# Altium PCB HMC5883_module.PcbDoc
Units mm, origin at the board's own origin, x right, y up, seen from the top; angles counter-clockwise.
Board outline 61.47 x 21.97 mm, 2 copper layers (Top Layer, Bottom Layer), stack 1.569 mm thick; 54 components, 38 nets, 185 pads, 112 vias.
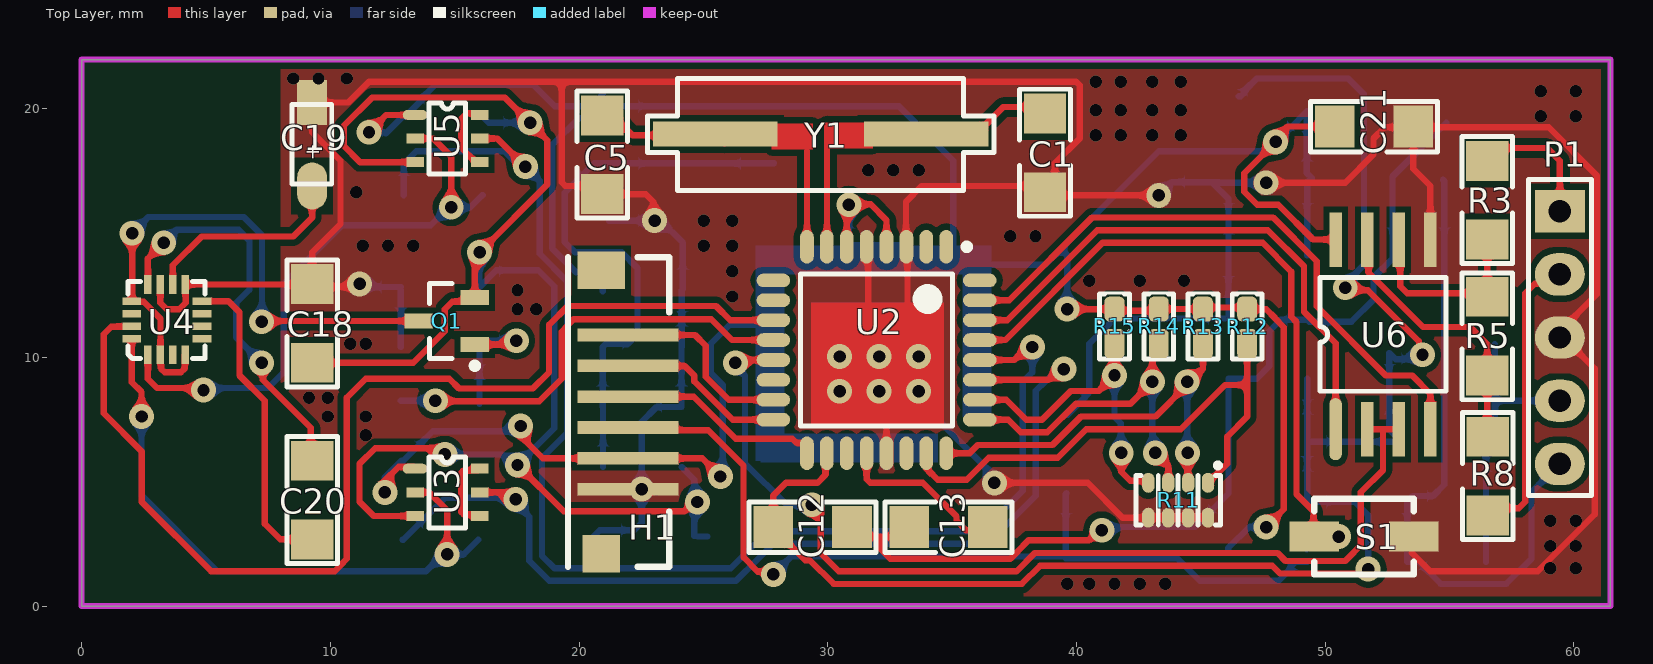
[diagram p0: Top Layer view]
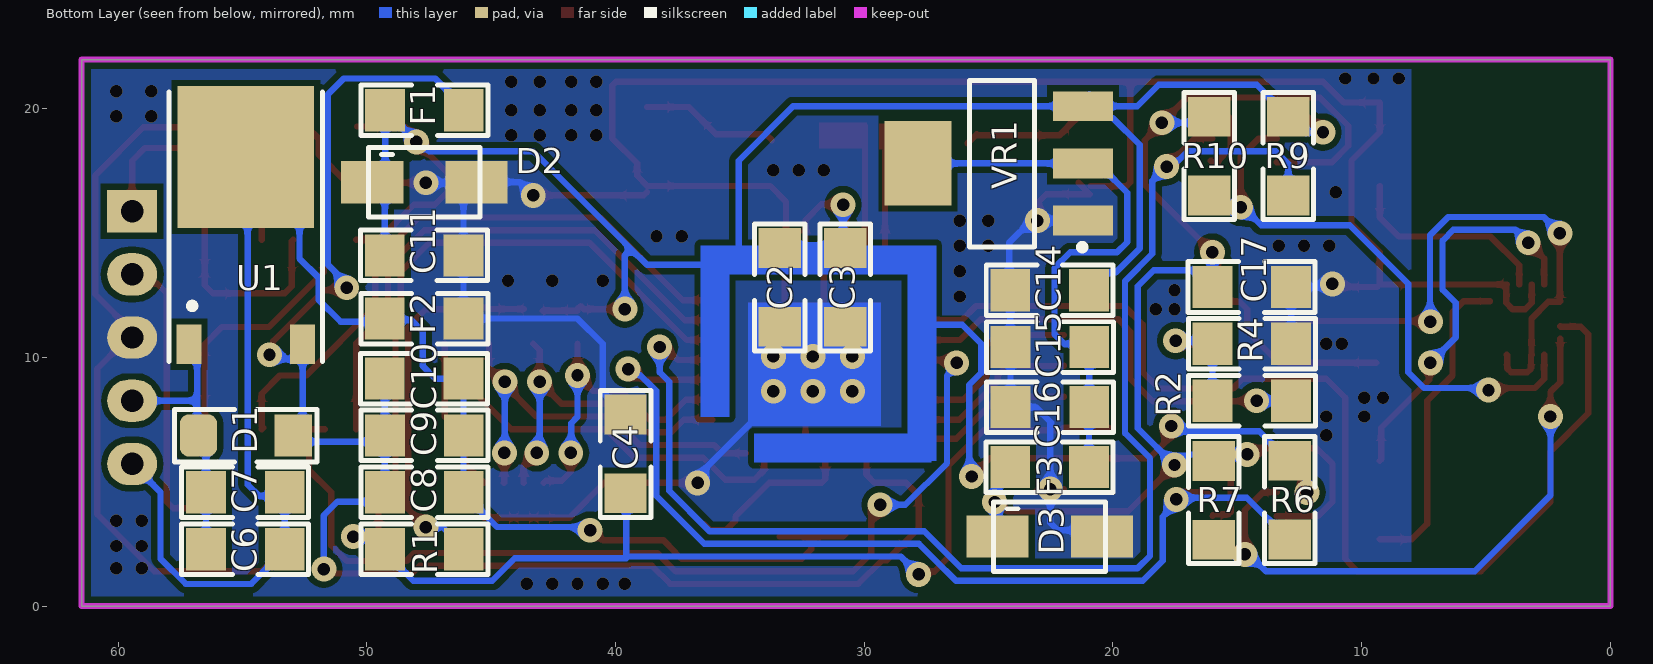
[diagram p1: Bottom Layer view, seen from below]

## Layer stack, top to bottom
Top Solder: solder mask 0.0254, SM-001, Dk 4
Top Layer: signal copper 0.035
Dielectric1: core 1.4986, Core-043, Dk 4.3
Bottom Layer: signal copper 0.035
Bottom Solder: solder mask 0.0254, SM-001, Dk 4

## Board outline
0,21.971 61.468,21.971 61.468,0 0,0

## Design rules (kind name [scope] priority, off if disabled: settings)
Clearance [All] p1: gap=0.127 ignorepadtopadclearanceinfootprint=FALSE
PolygonConnect [All] p1: connectstyle=Direct reliefconductorwidth=0.254 reliefentries=4 polygonreliefangle="90 Angle" airgapwidth=0.254
RoutingVias [All] p1: holewidth=0.5 width=1 viastyle="Through Hole" minholewidth=0.5 minwidth=1 maxholewidth=0.5 maxwidth=1
SolderMaskExpansion [All] p1: expansion=0.102 istentingtop=FALSE
Width [All] p1: maxlimit=0.254 minlimit=0.254 preferedwidth=0.254
30 further rules are at their usual default settings.

## Components (designator, comment, footprint, x,y, rotation, side; value= is the part's Value field where it differs from the comment)
C1 "18pF" 1206 38.76,18.237 r0 top
C2 "100nF" 1206 33.376,12.827 r180 bottom
C3 "100nF" 1206 30.734,12.827 r180 bottom
C4 "100nF" 1206 39.624,6.096 r0 bottom
C5 "18pF" 1206 20.955,18.161 r0 top
C6 "100nf" 1206 54.901,2.311 r90 bottom
C7 "100uf" 1206 54.901,4.597 r90 bottom
C8 "100uf" 1206 47.701,4.597 r90 bottom
C9 "100nf" 1206 47.701,6.883 r90 bottom
C10 "100nf" 1206 47.713,9.169 r90 bottom
C11 "100nf" 1206 47.713,14.122 r90 bottom
C12 "100nF" 1206 29.376,3.2 r90 top
C13 "100nF" 1206 34.874,3.15 r270 top
C14 "Cap" 1206 22.53,12.675 r270 bottom value=100nF
C15 "Cap" 1206 22.518,10.389 r270 bottom value=100uF
C16 "Cap" 1206 22.518,7.976 r270 bottom value=100nF
C17 "Cap" 1206 14.439,12.852 r90 bottom value=100nF
C18 "Cap" 1206 9.246,11.342 r180 top value=100nF
C19 "Cap2" CAP_SMD_A 9.246,18.567 r90 top value=4.7uf
C20 "Cap" 1206 9.296,4.279 r0 top value=220nf
C21 "Cap" 1206 51.943,19.304 r90 top value=100nF
D1 "D Schottky" ZINER 54.813,6.807 r90 bottom
D2 "SMBJ 5V" TVS 47.625,17.018 r270 bottom
D3 "SMBJ 3V3" TVS 22.479,2.769 r270 bottom
F1 "Ferrite-3uH" 1206 47.701,19.964 r90 bottom
F2 "Ferrite-3uH" 1206 47.676,11.532 r270 bottom
F3 "FERRITE BEAD" 1206 22.567,5.613 r90 bottom
H1 "White SMD Connector 6pin" "White SMD Connector 6pin B" 21.971,7.799 r90 top
P1 "Header 5" HDR1X5 59.436,15.875 r270 top
Q1 "BC807" SOT-23 14.732,11.43 r90 top
R1 "6.8k" 1206 47.701,2.311 r90 bottom
R2 "2.2K" 1206 14.402,8.23 r270 bottom
R3 "22" 1206 56.54,16.332 r0 top
R4 "10k" 1206 14.402,10.516 r270 bottom
R5 "220" 1206 56.49,10.834 r180 top
R6 "2.2K" 1206 12.864,4.279 r180 bottom
R7 "2.2K" 1206 15.927,4.267 r180 bottom
R8 "22" 1206 56.515,5.207 r180 top
R9 "2.2K" 1206 12.929,18.11 r180 bottom
R10 "2.2K" 1206 16.104,18.11 r180 bottom
R11 "4.7K" RP0603X4 44.088,4.253 r270 top
R12 "0" 0603 46.863,11.241 r270 top
R13 "0" 0603 45.085,11.241 r270 top
R14 "0" 0603 43.307,11.241 r270 top
R15 "0" 0603 41.529,11.241 r270 top
S1 "SW-PB_SMD" PB4x3.2 51.562,2.794 r180 top
U1 "L7805" DPAK 54.61,13.843 r90 bottom
U2 "ATmega328P-AU" 32A_L 31.963,10.293 r270 top
U3 "NDC7002N" SOP6 13.412,5.522 r0 top
U4 "HMC5883" LCC16 3.429,11.557 r90 top
U5 "NDC7002N" SOP6 13.412,19.746 r0 top
U6 "RS485 module" SOP8 52.197,10.922 r90 top
VR1 "AMS1117 3v3" LD1117 24.435,17.78 r90 bottom
Y1 "14.7456KHz" XTAL_SMD 29.464,18.923 r180 top

## Footprints (in the part's own frame and the unit in brackets; to place one, negate y for a bottom-side part, rotate by r counter-clockwise, add the part's x,y. Pads: shape width x height; smd on the part's side, far side on the other; paste and mask are expansions set on the pad)
32A_L [mm] "Thin QFP, 32-Leads, Body 7x7mm, Pitch 0.8mm, IPC High Density"
  oval 1.35x0.55 smd: 1(-4.15,2.8) 2(-4.15,2) 3(-4.15,1.2) 4(-4.15,0.4) 5(-4.15,-0.4) 6(-4.15,-1.2) 7(-4.15,-2) 8(-4.15,-2.8) 17(4.15,-2.8) 18(4.15,-2) 19(4.15,-1.2) 20(4.15,-0.4) 21(4.15,0.4) 22(4.15,1.2) 23(4.15,2) 24(4.15,2.8)
  oval 0.55x1.35 smd: 9(-2.8,-4.15) 10(-2,-4.15) 11(-1.2,-4.15) 12(-0.4,-4.15) 13(0.4,-4.15) 14(1.2,-4.15) 15(2,-4.15) 16(2.8,-4.15) 25(2.8,4.15) 26(2,4.15) 27(1.2,4.15) 28(0.4,4.15) 29(-0.4,4.15) 30(-1.2,4.15) 31(-2,4.15) 32(-2.8,4.15)
  silkscreen extent -4.27,-3.05 3.05,3.75, body extent -3.5,-3.5 3.5,3.5, height 1.2
0603 [mm] "1608, 160X80, 1.6x0.8mm (1.75x0.95mm)"
  rrect50% 1x0.8 smd mask+0.075: 1(-0.7,0)
  rrect50% 1.2x0.8 smd mask+0.075: 2(0.7,0)
  silkscreen extent -1.34,-0.6 1.34,0.6, body extent -0.87,-0.48 0.87,0.48, height 0.6
1206 [mm]
  rect 1.7x1.6 smd: 1(-0.025,-1.6) 2(-0.025,1.563)
  silkscreen extent -1.04,-2.57 0.99,2.54, body extent -0.81,-1.68 0.79,1.68, height 1.1
CAP_SMD_A [mm]
  oval 1.9x1.2 smd: 1(-1.676,-0.025)
  rect 1.8x1.2 smd: 2(1.676,-0.025)
  silkscreen extent -1.6,-0.81 1.6,0.79
DPAK [mm]
  rect 1.6x1 smd: 1(-3.319,2.539) 3(-3.319,-2.031)
  rect 5.7x5.5 smd: 2(4.208,0.254)
  silkscreen extent -4.02,-2.83 6.83,3.34
HDR1X5 [mm] "Connector; Header; 5 Position"
  rect 1.7x2 hole 0.9: 1(0,0)
  oval 1.7x2 hole 0.9: 2(2.54,0) 3(5.08,0) 4(7.62,0) 5(10.16,0)
  silkscreen extent -1.27,-1.27 11.43,1.27
LCC16 [mm] "HMC5883"
  rect 0.75x0.3 smd: 1(-1.455,0.762) 2(-1.455,0.262) 3(-1.455,-0.238) 4(-1.455,-0.738) 9(1.372,-0.738) 10(1.372,-0.238) 11(1.372,0.262) 12(1.372,0.762)
  rect 0.3x0.75 smd: 5(-0.804,-1.414) 6(-0.304,-1.414) 7(0.196,-1.414) 8(0.696,-1.414) 13(0.696,1.412) 14(0.196,1.412) 15(-0.304,1.412) 16(-0.804,1.412)
  silkscreen extent -1.6,-1.54 1.5,1.56, body extent -1.55,-1.5 1.45,1.5, height 0.9
LD1117 [mm]
  rect 1.2x2.4 smd: 1(-2.286,-3.226) 2(0.017,-3.226) 3(2.316,-3.226)
  rect 3.4x2.7 smd: 2(0.017,3.404)
  silkscreen extent -3.48,-3.32 3.35,1.33, body extent -3.35,-1.82 3.35,1.88, height 1.7
PB4x3.2 [mm]
  rect 2x1.2 smd: 1(-2,0) 2(2,0)
  silkscreen extent -2,-1.52 2,1.52
RP0603X4 [mm] "RPACK, 0603X4, 160X80X4 1206"
  oval 0.8x0.5 smd: 1(-0.7,1.2) 2(-0.7,0.4) 3(-0.7,-0.4) 4(-0.7,-1.2) 5(0.7,-1.2) 6(0.7,-0.4) 7(0.7,0.4) 8(0.7,1.2)
  silkscreen extent -1.5,-1.7 1,1.7, body extent -0.8,-1.6 0.8,1.6, height 0.5
SOP6 [mm]
  oval 1x0.4 smd: 1(0,0)
  rect 0.7x0.4 smd: 2(0,-0.95) 3(0,-1.9) 4(2.59,-1.9) 5(2.59,-0.95) 6(2.59,0)
  silkscreen extent 0.56,-2.38 2.03,0.48, body extent -0.13,-2.41 2.67,0.49, height 0.97
SOP8 [mm]
  oval 2.5x0.5 smd: 1(-3.81,1.778)
  rect 2.2x0.5 smd: 2(-3.81,0.508) 3(-3.81,-0.762) 4(-3.81,-2.032) 5(3.806,-2.032) 6(3.806,-0.762) 7(3.806,0.508) 8(3.806,1.778)
  silkscreen extent -2.29,-2.67 2.29,2.41
SOT-23 [mm]
  rect 0.6x1.15 smd: 1(-0.919,-1.081) 2(0.981,-1.081) 3(0.031,1.169)
  silkscreen extent -1.89,-1.21 1.53,0.74, body extent -1.42,-1.18 1.48,1.12, height 1
TVS [mm]
  rect 1.7x2.5 smd: 1(-0.025,-2.159) 2(-0.025,2.032)
  silkscreen extent -1.42,-2.32 1.38,2.18, body extent -1.5,-2.76 1.42,2.74, height 2.23
"White SMD Connector 6pin B" [mm] "White SMD Connector 6pin"
  rect 0.508x4.064 smd: 1(-3.1,0) 2(-1.86,0) 3(-0.62,0) 4(0.62,0) 5(1.86,0) 6(3.1,0)
  rect 1.5x1.5 smd: ""(-5.7,1.082)
  rect 1.5x1.9 smd: ""(5.7,1.082)
  silkscreen extent -6.22,-1.65 6.22,2.41
XTAL_SMD [mm]
  rect 5x1 smd: 1(-4.496,-0.051) 2(3.988,-0.051)
  silkscreen extent -7.21,-2.29 6.71,2.21
ZINER [mm]
  rect 1.7x1.5 smd mask+0.102: 1(0.051,-1.854)
  rrect50% 1.7x1.5 smd: 2(0.051,1.956)
  silkscreen extent -1.02,-2.82 1.09,2.92, body extent -0.75,-1.78 0.85,1.9, height 1.6

## Part data
C1 C2 C3 C4 C5 C12 C13: library part Cap, "Capacitor", LatestRevisionDate=17-Jul-2002, LatestRevisionNote="Re-released for DXP Platform.", PackageReference=RAD-0.3, Published=8-Jun-2000, Publisher="Altium Limited"
C6 C7 C8 C9 C10 C11: library part Cap, "Capacitor, 1206", LatestRevisionDate=17-Jul-2002, LatestRevisionNote="Re-released for DXP Platform.", PackageReference=RAD-0.3, Published=8-Jun-2000, Publisher="Altium Limited"
C14 C15 C16 C17 C18 C20 C21: "Capacitor", LatestRevisionDate=17-Jul-2002, LatestRevisionNote="Re-released for DXP Platform.", PackageReference=RAD-0.3, Published=8-Jun-2000, Publisher="Altium Limited"
C19: "TAN", PackageReference=CAPR5-4X5, Published=23-Sep-2002, Publisher="Altium Limited"
D1: "Schottky Diode, 1N4148", Code_JEDEC=DO-214-AA, LatestRevisionDate=17-Jul-2002, LatestRevisionNote="Re-released for DXP Platform.", PackageReference=SMB, Published=8-Jun-2000, Publisher="Altium Limited"
D2: library part "Diode 18TQ045", "Schottky Rectifier", ComponentLink1Description="Manufacturer Link", ComponentLink1URL=http://www.irf.com/, ComponentLink2Description=Datasheet, ComponentLink2URL=http://www.irf.com/product-info/datasheets/data/18tq.pdf, DatasheetVersion=Dec-1997, LatestRevisionDate=17-Jul-2002, LatestRevisionNote="Re-released for DXP Platform.", Note="Terminal 2 is the TAB and is electrically connected to the cathode", PackageReference=TO-220AC, PackageVersion=Feb-1998, Published=8-Jun-2000, Publisher="Altium Limited"
D3: library part "Diode 18TQ045", "TVS", ComponentLink1Description="Manufacturer Link", ComponentLink1URL=http://www.irf.com/, ComponentLink2Description=Datasheet, ComponentLink2URL=http://www.irf.com/product-info/datasheets/data/18tq.pdf, DatasheetVersion=Dec-1997, LatestRevisionDate=17-Jul-2002, LatestRevisionNote="Re-released for DXP Platform.", Note="Terminal 2 is the TAB and is electrically connected to the cathode", PackageReference=TO-220AC, PackageVersion=Feb-1998, Published=8-Jun-2000, Publisher="Altium Limited"
F1 F2: library part Inductor, "Inductor", Code_IEC=1005, Code_JEITA=0402, LatestRevisionDate=29-May-2009, LatestRevisionNote="IPC-7351 Footprint Added.", PackageDescription="Chip Inductor", PackageReference=0402-A, Published=8-Jun-2000, Publisher="Altium Limited"
F3: library part Inductor, Code_IEC=1005, Code_JEITA=0402, LatestRevisionDate=29-May-2009, LatestRevisionNote="IPC-7351 Footprint Added.", PackageDescription="Chip Inductor", PackageReference=0402-A, Published=8-Jun-2000, Publisher="Altium Limited"
H1: library part "Header 6", LatestRevisionDate=17-Jul-2002, LatestRevisionNote="Re-released for DXP Platform.", Publisher="Altium Limited"
P1: "Header, 5-Pin", LatestRevisionDate=17-Jul-2002, LatestRevisionNote="Re-released for DXP Platform.", Publisher="Altium Limited"
Q1: library part 2N3906, "PNP General Purpose Amplifier", ComponentLink1Description="Manufacturer Link", ComponentLink1URL=http://www.fairchildsemi.com/, ComponentLink2Description=Datasheet, ComponentLink2URL=http://www.fairchildsemi.com/ds/2N%2F2N3906.pdf, DatasheetVersion=1997, LatestRevisionDate=15-Jan-2003, LatestRevisionNote="PCB Footprint 'BCY-W3/D4.7' replaced", PackageDescription="TO, Flat Index; 3 In-Line, Axial Leads; Body Dia. 4.5mm; Leads 0.51 x 0.48 mm (max)", PackageReference=TO-92A, PackageVersion=Sep-1998, Published=8-Jun-2000, Publisher="Altium Limited"
R1 R12 R13 R14 R15: library part Res1, "Resistor, 6.8k", LatestRevisionDate=17-Jul-2002, LatestRevisionNote="Re-released for DXP Platform.", PackageReference=AXIAL-0.3, Published=8-Jun-2000, Publisher="Altium Limited"
R2 R3 R4 R5 R6 R7 R8 R9 R10: library part Res1, "Resistor", LatestRevisionDate=17-Jul-2002, LatestRevisionNote="Re-released for DXP Platform.", PackageReference=AXIAL-0.3, Published=8-Jun-2000, Publisher="Altium Limited"
R11: library part RES_ARRAY_4
S1: library part SW-PB, "Switch", LatestRevisionDate=17-Jul-2002, LatestRevisionNote="Re-released for DXP Platform.", PackageReference=SPST-2, Published=24-Mar-1999, Publisher="Altium Limited"
U1: library part L7805CD2T, "Positive Voltage Regulator", ComponentLink1Description="Manufacturer Link", ComponentLink1URL=http://www.st.com/, DatasheetVersion=Dec-1998, LatestRevisionDate=17-Jul-2002, LatestRevisionNote="Re-released for DXP Platform.", PackageDescription="D2-PAK/TO-263-AB; 3 Leads (1 Cropped); Body 15.9 (inc. leads) x 10.4 mm (LxW max)", PackageReference=TO-263, Published=24-Aug-2001, Publisher="Altium Limited"
U2: "8-bit AVR Microcontroller, 32KB Flash, 1KB EEPROM, 2KB SRAM, 32-pin TQFP, Industrial Grade (-40°C to 85°C)", Supplier Part Number 1=ATMEGA328P-AU-ND, Code_JEDEC=MS-026-ABA, ComponentLink1Description="Manufacturer Link", ComponentLink1URL=http://www.atmel.com/products/avr/default.asp?, ComponentLink2Description="ATmega48A/48PA/88A/88PA/168A/168PA/328/328P Datasheet", ComponentLink2URL=http://www.atmel.com/dyn/resources/prod_documents/8271.pdf, ComponentLink3Description="ATmega48A/48PA/88A/88PA/168A/168PA/328/328P Summary", ComponentLink3URL=http://www.atmel.com/dyn/resources/prod_documents/8271S.pdf, ComponentLink4Description="Atmel.com Home", ComponentLink4URL=http://www.atmel.com, DatasheetVersion="revA, Jan-2010", PackageDescription="32-Lead, 7x7x1.0 mm Body, 0.8mm Lead Pitch, Thin Profile Plastic Quad Flat Package (TQFP)", PackageReference=32A, PackageVersion="revB, Oct-2001", Published=1-Apr-2010, Publisher="Altium Limited", Supplier 1=Digi-Key, Supplier 2=Farnell, Supplier 3=Mouser, Supplier Part Number 2=1715486, Supplier Part Number 3=556-ATMEGA328P-AU
U6: library part rs485
VR1: library part "Volt Reg", "Voltage Regulator", LatestRevisionDate=29-May-2009, LatestRevisionNote="IPC-7351 Footprint Added.", PackageDescription="3-Pin Transistor Outline Package 2.54 mm Pitch, 15.1 mm Lead Span", PackageReference=D2PAK, Published=24-Mar-1999, Publisher="Altium Limited"
Y1: library part XTAL, "Crystal Oscillator, 14.7456KHz", LatestRevisionDate=17-Jul-2002, LatestRevisionNote="Re-released for DXP Platform.", PackageReference=R38, Published=8-Jun-2000, Publisher="Altium Limited"

## Via types
v1: diameter 0.5, hole 0.5, Top Layer to Bottom Layer, 59 vias
v2: diameter 1, hole 0.5, Top Layer to Bottom Layer, 53 vias

## Nets (pads, with @x,y where several pads share a name; then routed paths per layer and width w, separated by ;. In a path a pad name is that pad's centre, name@x,y a point inside that pad or via, vN(x,y) a via of type N, cw(c..) or ccw(c..) an arc to the next point about the centre after c; other vN are vias at no path point)
3V3D: C17.2 C18.2 D3.1 F3.2 Q1.2 R7.2 R10.2 U3.3 U5.3 | length 66.2
  Top Layer w0.254: C18.2@9.41,9.779 13.335,9.779 14.605,11.049 14.605,11.938 14.905,12.238 15.64,12.238 Q1.2 15.813,14.035 v2(16.002,14.224) 18.725,16.947 18.725,18.727 18.034,19.417 v2(18.034,19.431) 17.018,20.447 11.684,20.447 10.541,19.304 10.541,18.498 11.193,17.846 U5.3 ; U3.3 11.745,3.622 11.176,4.191 11.176,5.715 11.811,6.35 14.351,6.35 v2(14.605,6.096) ; v2(17.526,5.671) 19.387,3.81 24.235,3.81 24.609,4.183 v2(24.757,4.183)
  Bottom Layer w0.254: v2(14.605,6.096) 15.952,6.096 16.899,6.096 17.324,5.671 v2(17.526,5.671) 19.006,7.151 19.006,12.857 18.362,13.502 16.675,13.502 C17.2@16.002,12.829 ; C17.2 C17.2@16.002,12.829 ; v2(16.002,14.224) C17.2@16.002,12.829 ; R10.2@16.141,19.685 R10.2 16.371,19.431 v2(18.034,19.431) ; F3.2 24.638,5.08 v2@24.638,4.318 ; D3.1@24.638,2.819 24.638,4.199 v2@24.638,4.318 ; v2(24.757,4.183) 24.757,4.199 v2@24.638,4.318 ; D3.1@24.765,2.794 D3.1@25.165,2.794
5V0A: C8.2 C9.2 C10.2 C12.2 D1.1 F1.1 U1.3 U2.18 | length 67
  Top Layer w0.254: U2.18 29.906,6.086 29.906,5.268 29.591,4.953 28.321,4.953 27.813,4.445 C12.2 27.813,3.125 29.093,1.845 29.277,1.845 30.234,0.889 37.802,0.889 38.537,1.623 47.876,1.623 48.194,1.305 51.549,1.305 v2(51.728,1.485) ; v2(50.808,12.795) 50.903,12.7 51.717,12.7 53.768,10.649 53.768,10.248 v2(53.911,10.105)
  Bottom Layer w0.254: F1.1@46.525,20.49 46.602,20.49 46.774,20.662 46.774,20.739 47.244,21.209 50.927,21.209 51.562,20.574 51.562,13.716 50.808,12.962 v2(50.808,12.795) ; C10.2 C9.2@49.276,6.604 ; v2(51.728,1.485) 51.728,3.644 51.689,3.683 51.181,4.191 49.276,4.191 C9.2@49.276,6.604 ; v2(53.911,10.105) 53.729,9.923 52.833,9.923 52.579,10.177 52.579,7.086 53.01,6.655 52.959,6.604 C9.2@49.276,6.604
5V0D: C2.2 C3.2 C11.2 C14.2 C21.2 D2.1 F1.2 H1.2 R1.1 R6.2 R9.2 R12.1 R13.1 R14.1 R15.1 U2.4 U2.6 U3.1 U5.1 U6.8 VR1.3 | length 130.1
  Top Layer w0.254: v2(11.557,19.05) 12.253,19.746 U5.1 ; v2(12.192,4.572) 12.192,5.032 12.755,5.595 13.339,5.595 U3.1 ; v2(17.653,7.239) 17.653,7.149 17.493,6.988 18.542,5.939 H1.2 24.952,5.939 v2(25.684,5.207) ; U2.6 30.763,16.045 30.869,16.151 31.728,16.151 32.363,15.516 U2.4 ; v2(39.624,11.938) 41.278,11.938 41.405,12.065 R15.1 ; R15.1@41.529,11.876 R14.1@42.926,11.876 ; R14.1@43.688,11.941 R13.1 ; R13.1@45.212,12.003 R12.1@46.609,12.003 ; R12.1 46.866,11.938 47.625,11.938 47.983,11.58 47.983,11.566 48.34,11.209 48.34,3.89 v2(47.625,3.175) ; v2(48.005,18.663) 46.744,17.402 46.744,16.653 47.268,16.129 48.115,16.129 49.509,14.736 50.411,14.736 U6.8 ; v2@48.006,18.796 48.489,19.279 C21.2
  Bottom Layer w0.254: v2(11.557,19.05) R9.2@12.156,19.05 ; v2(12.192,4.572) 12.192,5.169 12.865,5.842 R6.2 12.939,5.842 14.122,7.025 15.043,7.025 15.044,7.024 17.438,7.024 v2(17.653,7.239) ; R9.2@12.231,19 12.904,19.673 R9.2 13.004,19.673 13.677,20.346 13.677,20.408 14.224,20.955 18.161,20.955 19.02,20.096 VR1.3@20.609,20.096 ; VR1.3@20.701,20.32 VR1.3@20.955,20.574 ; C14.2@20.955,12.656 20.955,12.762 20.294,13.423 19.877,13.423 18.923,14.377 18.923,18.542 20.004,19.623 20.136,19.623 VR1.3@20.609,20.096 ; v2(25.684,5.207) 25.781,5.304 25.781,8.89 25.299,9.372 25.299,10.541 26.061,11.303 27.559,11.303 ; 28.702,13.843 28.829,13.97 29.845,13.97 ; C3.2 30.853,14.483 C3.2@30.853,14.517 ; v2(30.853,16.135) C3.2@30.853,14.517 ; C2.2@33.274,14.517 C3.2@30.853,14.517 ; 35.052,13.97 35.052,17.907 32.863,20.096 VR1.3 VR1.3@20.609,20.096 ; 35.687,13.843 35.814,13.716 38.735,13.716 39.37,14.351 ; 36.195,14.224 36.322,14.224 ; v2(39.624,11.938) 39.624,14.097 39.37,14.351 ; R1.1 46.101,2.336 46.94,3.175 v2(47.625,3.175) ; C11.2 49.276,17.03 49.461,17.214 49.264,17.411 49.264,19.889 48.591,19.216 48.541,19.216 47.996,18.671 47.867,18.671 47.483,18.288 43.307,18.288 39.37,14.351
DRDY: U2.11 U4.15 | length 45.1
  Top Layer w0.254: U4.15 1.999,11.235 1.193,11.235 0.889,10.931 0.889,7.747 2.422,6.214 2.422,4.182 5.207,1.397 10.178,1.397 10.502,1.721 10.502,1.739 10.668,1.905 10.668,8.382 11.43,9.144 14.78,9.144 15.177,8.747 18.145,8.747 18.796,9.398 18.796,11.303 19.558,12.065 25.505,12.065 26.077,11.493 U2.11
GND: C6.1 C7.1 C8.1 C9.1 C10.1 C12.1 C13.1 F2.1 P1.5 U1.2 | length 66
  Top Layer w0.254: C12.1@30.734,2.921 30.861,2.794 32.131,2.794 ; C13.1@33.401,2.794 32.131,2.794 ; v2(41.021,3.048) 40.908,3.048 40.499,2.639 38.072,2.639 37.618,2.185 37.618,2.167 37.395,1.944 37.377,1.944 37.338,1.905 32.512,1.905 32.131,2.286 32.131,2.794
  Bottom Layer w0.254: v2(41.021,3.048) 41.148,3.175 44.754,3.175 C8.1@46.101,4.522 ; C8.1@46.113,4.522 46.113,6.858 C10.1 47.244,9.144 47.752,9.652 47.752,11.049 48.21,11.507 F2.1@49.276,11.507 ; F2.1 F2.1@49.276,11.507 ; U1.2@54.737,17.145 54.792,17.09 54.792,4.881 54.333,4.422 53.532,4.422 53.301,4.191 C6.1 53.301,1.778 53.759,1.778 54.648,0.889 57.277,0.889 58.293,1.905 58.293,4.572 P1.5 ; U1.2@54.864,19.431 52.705,17.272 52.705,13.97 51.943,13.208 51.943,12.319 51.054,11.43 49.353,11.43 F2.1@49.276,11.507
GNDD: C1.1 C2.1 C3.1 C4.1 C5.1 C11.1 C14.1 C15.1 C16.1 C17.1 C18.1 C19.2 C21.1 D2.2 D3.2 F2.2 H1.1 P1.3 R4.2 R11.5 R11.6 R11.7 R11.8 S1.1 U2.3 U2.5 U2.21 U4.9 U4.11 U6.5 VR1.1 | length 191.3
  Top Layer w0.254: U4.11 3.167,12.2 3.429,11.938 3.937,11.938 4.191,12.192 4.19,12.193 4.19,12.906 U4.9 9.258,12.929 C18.1 ; v2@11.176,12.827 9.386,12.827 C18.1 ; C5.1@20.893,16.891 19.453,16.891 19.304,17.04 19.304,21.082 ; C5.1@21.387,17.018 C5.1 22.682,16.561 22.987,16.256 22.987,15.545 v2(23.038,15.494) ; H1.1 22.997,4.699 H1.1@23.124,4.572 ; U2.5@31.604,14.056 31.547,13.999 31.623,13.924 31.623,11.938 30.734,11.049 30.734,8.636 30.928,8.83 30.928,9.613 33.204,11.889 U2.3@33.204,14.056 ; U2.21 32.363,7.725 32.385,7.747 32.404,7.728 ; U2.3 33.147,14.459 33.147,16.256 33.782,16.891 C1.1@38.735,16.891 ; 33.196,7.604 33.196,8.304 v2@33.528,8.636 ; v2(36.703,4.953) 40.449,4.953 41.849,3.553 R11.6 R11.7 R11.8 ; C1.1 38.862,16.51 v2(43.307,16.51) ; C1.1@38.735,16.903 39.132,17.3 39.132,17.796 40.132,18.796 40.132,20.933 39.983,21.082 19.304,21.082 ; v2(47.625,17.018) 50.8,17.018 51.943,18.161 51.943,18.796 52.397,19.25 C21.1@53.543,19.25 ; S1.1@53.467,2.667 53.467,2.159 54.229,1.397 58.547,1.397 60.833,3.683 60.833,9.548 59.586,10.795 P1.3 ; C21.1@53.514,19.279 C21.1@53.543,19.25 ; C21.1@53.699,19.406 C21.1@53.543,19.25 ; U6.5 54.229,16.891 53.543,17.577 C21.1@53.543,19.25 ; P1.3@59.69,11.43 59.817,11.43 60.921,12.534 60.921,17.311 58.982,19.25 C21.1@53.543,19.25 ; C18.1 9.271,14.224 10.414,15.367 10.414,17.907 9.271,19.05 C19.2 10.719,20.244 11.557,21.082 19.304,21.082
  Bottom Layer w0.254: v2(11.176,12.954) 11.303,12.827 C17.1 ; R4.2@12.839,10.414 R4.2 C17.1@12.839,12.7 ; D3.2@20.447,2.667 20.828,3.048 22.225,3.048 22.521,3.344 v2(22.521,4.699) 22.521,7.334 22.484,7.371 23.114,8.001 C16.1 C15.1 24.13,10.426 C14.1 24.169,12.739 24.169,14.617 23.292,15.494 v2(23.038,15.494) VR1.1 ; 33.274,7.747 33.401,7.62 34.163,7.62 34.306,7.477 34.379,7.477 ; 34.595,7.333 36.703,5.225 v2(36.703,4.953) ; C4.1 39.649,7.696 40.322,8.369 40.322,8.419 40.513,8.611 40.513,10.541 41.529,11.557 F2.2 C11.1 46.113,16.371 45.466,17.018 v2(47.625,17.018) ; v2(43.307,16.51) 43.84,17.043 D2.2@45.72,17.043
  other v1: 39.624,0.889 40.513,0.889 41.529,0.889 42.545,0.889 43.561,0.889 59.055,1.524 60.069,1.524 59.055,2.413 60.071,2.413 59.055,3.429 60.071,3.429 11.43,6.858 9.906,7.62 11.43,7.62 9.144,8.382 9.906,8.382 10.795,10.541 11.43,10.541 17.526,11.938 18.288,11.938 18.288,11.938 26.162,12.446 17.526,12.7 40.513,13.081 42.545,13.081 44.323,13.081 26.162,13.462 11.303,14.478 12.319,14.478 13.335,14.478 25.019,14.478 26.162,14.478 37.338,14.859 38.354,14.859 25.019,15.494 26.162,15.494 11.049,16.637 31.623,17.526 32.639,17.526 33.655,17.526 40.767,18.923 41.783,18.923 43.053,18.923 44.196,18.923 58.674,19.685 60.071,19.685 40.767,19.939 41.783,19.939 43.053,19.939 44.196,19.939 58.674,20.701 60.071,20.701 40.767,21.082 41.783,21.082 43.053,21.082 44.196,21.082 8.509,21.209 9.525,21.209 10.668,21.209
  other v2: 30.48,8.636 32.067,8.636 33.655,8.636 30.48,10.033 32.067,10.033 33.655,10.033
MCU_RST: C4.2 H1.3 R1.2 S1.2 U2.29 | length 64.8
  Top Layer w0.254: H1.3@20.193,7.179 H1.3 22.083,7.067 25.191,7.067 26.615,5.643 26.615,1.96 27.19,1.385 27.698,1.385 v2(27.813,1.27) ; U2.29 37.133,10.693 41.045,14.605 47.484,14.605 48.641,13.448 48.641,11.626 48.848,11.419 48.848,4.492 49.53,3.81 S1.2@49.53,2.54
  Bottom Layer w0.254: v2(27.813,1.27) 28.535,1.992 39.548,1.992 39.57,2.014 ; C4.2 39.57,4.505 39.57,1.927 44.047,1.927 44.958,1.016 48.13,1.016 48.591,1.477 48.591,1.563 48.806,1.778 R1.2@49.276,1.778 ; R1.2 49.772,2.794 v2(50.546,2.794)
MCU_RX: U2.30 U6.1 | length 22.2
  Top Layer w0.254: U2.30 37.215,11.493 40.835,15.113 47.694,15.113 49.149,13.658 49.149,11.837 50.419,10.567 U6.1
MCU_SCL: R9.1 U2.28 U5.5 | length 55.2
  Top Layer w0.254: U5.5 16.717,18.796 v2(17.843,17.669) 17.843,17.559 v2@17.653,17.368 ; U2.28 37.504,9.893 38.025,10.414 v2(38.227,10.414)
  Bottom Layer w0.254: R9.1 12.954,17.78 13.462,18.288 16.996,18.288 17.36,17.924 17.387,17.924 17.642,17.669 v2(17.843,17.669) 18.415,17.098 18.415,14.166 19.514,13.068 19.514,6.941 18.509,5.936 18.509,2.028 19.013,1.524 26.103,1.524 26.416,1.837 27.592,3.013 36.224,3.013 37.846,4.635 37.846,9.012 38.227,9.393 v2(38.227,10.414)
MCU_SDA: R6.1 U2.27 U3.5 | length 40.9
  Top Layer w0.254: U3.5 17.131,4.572 17.417,4.286 v2(17.455,4.286) ; U2.27 38.863,9.093 39.295,9.525 v2(39.497,9.525)
  Bottom Layer w0.254: R6.1@12.901,2.667 R6.1@12.914,2.654 ; R6.1@12.927,2.667 14.617,4.357 17.233,4.357 17.304,4.286 v2(17.455,4.286) ; v2@17.379,4.211 18.001,3.589 18.001,1.818 18.802,1.016 26.313,1.016 27.181,1.884 27.802,2.505 36.434,2.505 38.368,4.438 38.368,8.65 38.368,8.654 38.591,8.877 38.595,8.877 39.001,9.283 39.053,9.283 39.295,9.525 v2(39.497,9.525)
MCU_TX: U2.31 U6.4 | length 24.9
  Top Layer w0.254: U2.31 37.296,12.293 40.624,15.621 47.905,15.621 49.657,13.869 49.657,12.047 52.433,9.271 53.499,9.271 54.229,8.541 U6.4@54.229,7.231 ; U6.4@54.17,7.171 U6.4
MISO: H1.5 U2.16 | length 6.9
  Top Layer w0.254: H1.5 21.978,9.652 24.257,9.652 24.638,9.271 24.638,9.031 26.176,7.493 U2.16
MOSI: H1.6 U2.15 | length 7.7
  Top Layer w0.254: H1.6@21.529,10.914 H1.6@21.567,10.952 ; H1.6 24.661,10.899 25.092,10.468 25.092,9.219 26.018,8.293 U2.15
NetC13_2: C13.2 U2.20 | length 7
  Top Layer w0.254: U2.20 31.563,5.102 31.712,4.953 33.826,4.953 35.179,3.6 35.179,3.429 35.56,3.048 36.195,3.048 C13.2@36.449,3.302
NetC15_2: C15.2 C16.2 F3.1 VR1.2 | length 23.3
  Bottom Layer w0.254: F3.1 20.967,7.989 C16.2 C15.2 21.082,10.541 21.971,10.541 22.352,10.922 22.352,13.589 21.717,14.224 19.841,14.224 19.431,14.633 19.431,16.619 20.609,17.797 VR1.2@27.838,17.797
NetC19_1: C19.1 U4.10 | length 8.4
  Top Layer w0.254: U4.10 3.667,13.7 4.826,14.859 8.509,14.859 9.271,15.621 C19.1
NetC20_1: C20.1 U4.8 | length 12.8
  Top Layer w0.254: U4.8 5.908,12.253 6.35,11.811 6.35,9.271 7.366,8.255 7.366,3.302 7.989,2.679 C20.1
NetC20_2: C20.2 U4.12 | length 16.1
  Top Layer w0.254: U4.12 2.667,13.97 v2(3.302,14.605) ; v2(7.239,9.779) 7.29,9.728 7.29,9.093 9.22,7.163 9.22,5.893 C20.2
  Bottom Layer w0.254: v2(3.302,14.605) 3.302,14.613 3.816,15.127 6.315,15.127 6.748,14.693 6.748,12.717 6.223,12.192 6.223,10.795 v2(7.239,9.779)
NetP1_1: P1.1 R3.2 | length 5.2
  Top Layer w0.254: R3.2@56.515,18.415 58.928,18.415 59.436,17.907 P1.1
NetP1_2: P1.2 R8.2 | length 11.7
  Top Layer w0.254: R8.2@56.515,3.937 57.785,3.937 58.039,4.191 58.039,12.573 58.427,12.961 58.521,12.961 58.895,13.335 P1.2
NetQ1_1: Q1.1 R2.1 R4.1 | length 5.6
  Top Layer w0.254: Q1.1 17.332,10.511 17.481,10.66 v2(17.481,10.668)
  Bottom Layer w0.254: R2.1@16.002,8.128 R4.1@16.002,10.414 ; R4.1 16.129,10.668 v2(17.481,10.668)
NetQ1_3: Q1.3 U4.2 U4.4 U4.13 | length 23.4
  Top Layer w0.254: U4.13 2.04,12.23 2.502,12.23 3.175,11.557 3.175,10.11 U4.2 3.19,10.079 3.19,9.547 3.339,9.398 3.995,9.398 4.144,9.547 4.144,10.079 U4.4 ; U4.13@2.032,12.284 v2(2.032,14.986) ; v2@7.27,11.461 Q1.3
  Bottom Layer w0.254: v2(2.032,14.986) 2.686,15.64 6.52,15.64 7.256,14.904 7.256,11.447 v2(7.239,11.43)
NetR7_1: R7.1 U3.2 U4.16 | length 25.2
  Top Layer w0.254: U4.16 2.017,9.002 2.413,8.606 v2(2.413,7.62) ; U3.2 13.97,4.572 14.698,3.844 v2(14.698,2.075)
  Bottom Layer w0.254: v2(2.413,7.62) 2.413,4.445 5.461,1.397 13.848,1.397 14.526,2.075 v2(14.698,2.075) 15.36,2.075 R7.1
NetR10_1: R10.1 U4.1 U5.2 | length 24.1
  Top Layer w0.254: U4.1 2.667,9.144 3.048,8.763 v2@4.901,8.763 ; U5.2 14.142,18.796 14.863,18.074 v2(14.863,16.031)
  Bottom Layer w0.254: v2(4.901,8.682) 4.78,8.682 4.699,8.763 4.901,8.763 7.493,8.763 8.128,9.398 8.128,12.954 10.477,15.303 14.04,15.303 14.767,16.031 v2(14.863,16.031) 15.626,16.031 16.105,16.51 R10.1
NetR11_1: R11.1 R12.2 U2.23 | length 21.5
  Top Layer w0.254: U2.23 34.02,6.086 34.02,5.477 34.417,5.08 35.584,5.08 36.47,5.966 39.247,5.966 40.393,7.112 44.196,7.112 45.974,8.89 46.863,8.89 ; R11.1 46.056,5.721 46.056,6.813 46.863,7.62 46.863,8.89 ; R12.2 46.863,8.89
NetR11_2: R11.2 R13.2 U2.24 | length 16.9
  Top Layer w0.254: U2.24 35.7,6.143 36.032,6.474 39.037,6.474 40.183,7.62 43.18,7.62 44.45,8.89 v2(44.45,9.017) 44.567,9.017 45.085,9.535 R13.2 ; v2(44.469,6.158) 44.478,6.148 44.478,4.962 R11.2
  Bottom Layer w0.254: v2(44.45,9.017) 44.45,6.177 v2(44.469,6.158)
NetR11_3: R11.3 R14.2 U2.25 | length 14
  Top Layer w0.254: U2.25 37.255,7.493 37.766,6.982 38.826,6.982 39.98,8.136 42.172,8.136 v2(43.053,9.017) 43.053,10.287 R14.2 ; v2@43.199,6.158 v2(43.166,6.158) 43.697,5.627 43.697,4.962 R11.3
  Bottom Layer w0.254: v2(43.053,9.017) 43.053,6.271 v2(43.166,6.158)
NetR11_4: R11.4 R15.2 U2.26 | length 13
  Top Layer w0.254: U2.26 37.173,8.293 37.976,7.49 38.616,7.49 39.77,8.644 40.902,8.644 v2(41.529,9.271) R15.2 ; v2(41.802,6.158) 41.802,5.396 42.161,5.037 42.804,5.037 R11.4
  Bottom Layer w0.254: v2@41.529,9.26 41.529,7.606 41.783,7.352 v2@41.783,6.158
NetU3_4: U3.4 U3.6 | length 3.2
  Top Layer w0.254: U3.4 15.941,3.683 15.367,3.683 15.271,3.779 15.271,5.365 15.355,5.449 15.929,5.449 U3.6
NetU5_4: U5.4 U5.6 | length 3.1
  Top Layer w0.254: U5.6 15.936,19.812 15.494,19.812 15.271,19.589 15.271,18.427 15.852,17.846 U5.4 U5.4@16.063,17.907
RS485_A: R3.1 R5.1 U6.6 | length 8
  Top Layer w0.254: U6.6 53.016,14.671 53.016,12.853 53.296,12.573 56.192,12.573 56.515,12.896 R3.1@56.515,15.252
RS485_B: R5.2 R8.1 U6.7 | length 10.5
  Top Layer w0.254: U6.7 51.746,14.671 51.746,13.405 53.93,11.221 55.821,11.221 56.515,10.528 56.515,9.733 R8.1@56.515,7.366
RTS: U2.13 U6.2 U6.3 | length 40.4
  Top Layer w0.254: v2(26.289,9.779) 26.517,9.779 26.631,9.893 U2.13 ; v2(29.366,4.072) 29.567,4.072 29.716,3.923 29.718,3.923 29.718,2.123 30.444,1.397 37.592,1.397 38.326,2.131 48.086,2.131 48.404,1.813 50.808,1.813 50.908,1.913 50.911,1.913 51.435,2.437 51.435,4.572 52.324,5.461 52.324,7.112 ; U6.2 52.324,7.112 ; U6.3 52.324,7.112
  Bottom Layer w0.254: v2(26.289,9.779) 26.289,9.638 26.67,9.257 26.67,5.748 28.346,4.072 v2(29.366,4.072)
SCK: H1.4 U2.17 | length 8.3
  Top Layer w0.254: H1.4 24.608,8.419 26.296,6.731 28.575,6.731 28.753,6.553 29.026,6.553 29.163,6.416 U2.17
SENSOR_E\N\: R2.2 U2.12 | length 17.8
  Top Layer w0.254: v2(14.224,8.255) 14.24,8.239 18.399,8.239 19.304,9.144 19.304,11.027 19.558,11.281 19.558,11.311 19.781,11.534 25.318,11.534 26.159,10.693 U2.12
  Bottom Layer w0.254: R2.2 v2(14.224,8.255)
VCC_IN: C6.2 C7.2 D1.2 P1.4 U1.1 | length 11.5
  Bottom Layer w0.254: C6.2@56.464,1.778 56.464,4.191 56.464,6.299 56.82,6.655 56.82,8.255 ; U1.1@56.82,10.524 56.82,8.255 ; P1.4 56.82,8.255
XTAL1: C1.2 U2.7 Y1.1 | length 10.5
  Top Layer w0.254: U2.7 29.972,14.452 29.972,19.323 ; Y1.1@33.706,18.72 Y1.1 35.96,18.974 37.052,20.066 C1.2@38.735,20.066
XTAL2: C5.2 U2.8 Y1.2 | length 9.4
  Top Layer w0.254: C5.2@20.955,20.066 21.005,20.066 22.148,18.923 25.425,18.923 Y1.2 Y1.2@25.849,18.601 ; U2.8 29.163,18.288 29.169,18.294
pads on no net: H1. U2.1 U2.2 U2.9 U2.10 U2.14 U2.19 U2.22 U2.32 U4.3 U4.5 U4.6 U4.7 U4.14

## Polygon pours and split planes (outlines as drawn)
GNDD on Bottom Layer "GNDD_L02_P002" (solid, remove dead copper, pour order 2): 0,21.971 61.468,21.971 61.468,0 0,0
no net on Bottom Layer "NONET_L02_P001" (solid, remove dead copper, pour order 1): 0,21.971
GNDD on Top Layer "GNDD_L01_P000" (solid, remove dead copper, pour order 0): 0,0 0,21.971 61.468,21.971 61.468,0

## Keep-outs
Keep-Out Layer:
  the board outline again, w0.254

## Other copper
Top Layer:
  region net XTAL1: 31.813,18.415 29.909,18.415 29.909,19.431 31.813,19.431
  region net XTAL2: 27.749,18.372 27.749,19.388 29.4,19.388 29.4,18.372
  region: 2.422,8.954 2.414,8.962
  region net GNDD: 29.337,12.192 34.671,12.192 34.671,7.239 29.337,7.239
  pour cut-out: 0.127,21.844 8.001,21.844 8.001,0.127 0.127,0.127
Bottom Layer:
  region net 5V0D: 27.115,14.478 28.258,14.478 28.257,5.842 27.114,5.842
  region net 5V0D: 34.417,6.921 34.417,5.778 27.305,5.779 27.305,6.921
  region net 5V0D: 27.114,13.335 27.114,14.478 36.576,14.478 36.576,13.335
  region net GNDD: 29.337,12.192 34.671,12.192 34.671,7.239 29.337,7.239
  region net 5V0D: 35.433,13.716 36.576,13.716 36.576,7.62 35.433,7.62
  pour cut-out: 0.127,0.127 0.127,21.844 8.001,21.844 8.001,0.127

## Silkscreen, mask and mechanical layers (free items; w line width, h text height)
Top Solder:
  drawing of 19 lines, arcs and shapes, not listed
  text "3" at 41.275,12.954 h1
  text "2" at 43.053,12.954 h1
  text "1" at 44.958,12.954 h1
  text "0" at 46.609,12.954 h1
  text "Y" at 3.556,6.731 h1
  text "x" at 6.731,4.191 h1 r90

## Text inside footprints (layer, text, board x,y; h text height)
C19: Top Overlay "+" at 9.55,17.907 h0.6 r90